# EAGLE board Adafruit MAX98357 Breakout (EAGLE 6.6.0)
REV: A
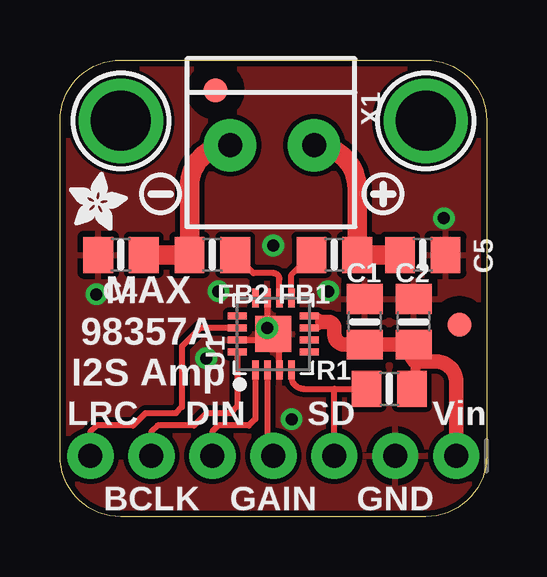
[diagram p0: board, top side]
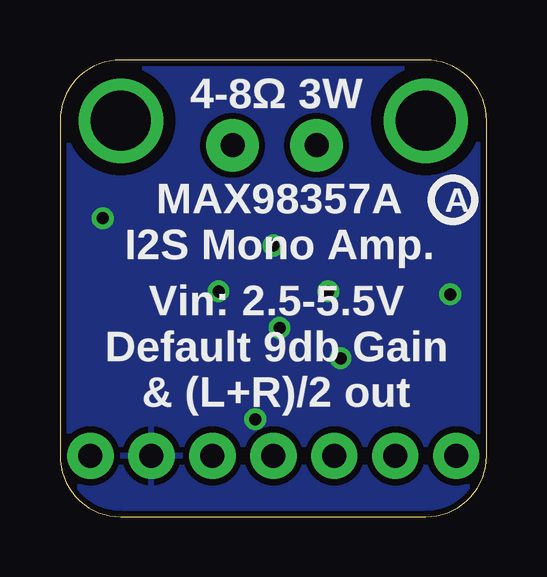
[diagram p1: board, bottom side, seen from below]

Size 17.78 x 19.05 mm. Coordinates in mm from the lower left corner, seen from the top.
Outline: 0,2.54 0,16.51 arc-90 2.54,19.05 15.24,19.05 arc-90 17.78,16.51 17.78,2.54 arc-90 15.24,0 2.54,0 arc-90 0,2.54
Copper layers (1*16): Top 0.035mm / dielectric 1.5mm / Bottom 0.035mm
Design rules "adafruit": minimum track width 8mil, minimum drill 15.5mil, track to track 8mil, track to pad 8mil, pad to pad 8mil, via to via 8mil, smd to smd 8mil, copper to edge 10mil, drill to drill 8mil, minimum pad ring 10mil, minimum via ring 8mil, stop-mask expansion 2mil, vias tented up to drill 20mil, thermal gap 10mil

## Footprints (pad centres in the part's own frame; a part is rotated, then mirrored left to right if it is on the bottom)
0805-NO = smd 1.24 x 1.5: 1 -0.95,0; 2 0.95,0
FIDUCIAL_1MM = smd 1 x 1: 1 0,0
1X07_ROUND_76 = drill 1 pad 1.93: 1 -7.62,0; 2 -5.08,0; 3 -2.54,0; 4 0,0; 5 2.54,0; 6 5.08,0; 7 7.62,0
QFN16_3MM = smd 0.8 x 0.28: 1 -1.5,0.75; 2 -1.5,0.25; 3 -1.5,-0.25; 4 -1.5,-0.75; 9 1.5,-0.75; 10 1.5,-0.25; 11 1.5,0.25; 12 1.5,0.75 | smd 0.28 x 0.8: 5 -0.75,-1.5; 6 -0.25,-1.5; 7 0.25,-1.5; 8 0.75,-1.5; 13 0.75,1.5; 14 0.25,1.5; 15 -0.25,1.5; 16 -0.75,1.5 | smd 1.5 x 1.5: THERMAL 0,0
MOUNTINGHOLE_2.5_PLATED = drill 2.5 pad 3.2: P$1 0,0
TERMBLOCK_1X2-3.5MM = drill 1 pad 2.184: 1 1.8,0; 2 -1.7,0

## Placement (x,y rotation side)
C1  0.1uF  [0805-NO]  12.7,8.13 90 top
C2  10uF  [0805-NO]  14.73,8.13 90 top
C4  220pF  [0805-NO]  2.54,10.92 180 top
C5  220pF  [0805-NO]  15.11,10.92 0 top
FB1  Ferrite  [0805-NO]  11.43,10.92 0 top
FB2  Ferrite  [0805-NO]  6.35,10.92 180 top
FID1  FIDUCIAL""  [FIDUCIAL_1MM]  16.64,8 0 top
FID2  FIDUCIAL""  [FIDUCIAL_1MM]  6.48,17.78 0 top
JP1  [1X07_ROUND_76]  8.89,2.54 180 top
R1  1M  [0805-NO]  13.72,5.33 0 top
U1  MAX98357A  [QFN16_3MM]  8.89,7.62 90 top
U$6  [SYMBOL_PLUS]  13.46,13.46 0 top
U$9  MOUNTINGHOLE2.5  [MOUNTINGHOLE_2.5_PLATED]  15.24,16.51 0 top
U$10  MOUNTINGHOLE2.5  [MOUNTINGHOLE_2.5_PLATED]  2.54,16.51 0 top
U$11  [SYMBOL_MINUS]  4.19,13.46 180 top
U$14  [ADAFRUIT_2.5MM]  0.38,11.94 0 top
U$15  [PCBFEAT-REV-040]  1.4,13.21 0 bottom
X1  [TERMBLOCK_1X2-3.5MM]  8.89,15.49 180 top

## Library data of the parts
C1 C2 C4 C5 FB1 FB2 JP1 R1 U1 U$6 U$11 U$14 U$15 X1 = microbuilder
FID1 FID2 U$9 U$10 = microbuilder; BOM: EXCLUDE

## Nets
BCLK: JP1.6 U1.16
DIN: JP1.5 U1.1
GAIN: JP1.4 U1.2
GND: C1.2 C2.2 C4.2 C5.2 JP1.2 U1.3 U1.11 U1.15 U1.THERMAL
LRCLK: JP1.7 U1.14
N$5: FB2.1 U1.10
N$6: FB1.1 U1.9
SD_MODE: JP1.3 R1.1 U1.4
VDD: C1.1 C2.1 JP1.1 R1.2 U1.7 U1.8
VO+: C5.1 FB1.2 X1.2
VO-: C4.1 FB2.2 X1.1

## Tracks (layer width: path | path; a pad name or v marks a point on that pad's centre or on a via)
BCLK
  Top 0.254: U1.16 7.39,4.6 7.11,4.32 6.1,4.32 5.59,3.81 4.06,3.81 3.81,3.56 JP1.6
DIN
  Top 0.254: U1.1 8.14,4.08 7.87,3.81 6.6,3.81 6.35,3.56 JP1.5
GAIN
  Top 0.254: U1.2 8.64,2.79 arc90 JP1.4
GND  (via drill 0.5)
  Top 0.254: U1.11 v8.64,7.87 arc90 U1.THERMAL | U1.15 8.64,7.37 arc90 U1.THERMAL | U1.3 9.14,7.37 arc90 U1.THERMAL
  other vias: 9.65,4.07 6.6,9.4 11.17,9.4 8.89,11.31 1.52,9.28 16,12.45 6.09,6.61
  pour Bottom (isolate 0.254): 17.78,19.05 17.78,0 0,0 0,19.05
  pour Top (isolate 0.203): 17.78,19.05 17.78,0 0,0 0,19.05
LRCLK
  Top 0.254: U1.14 5.84,7.87 5.08,7.11 5.08,4.57 4.83,4.32 3.56,4.32 3.05,3.81 1.52,3.81 1.27,3.56 JP1.7
N$5
  Top 0.254: U1.10 9.14,9.91 arc90 8.89,10.16 8.06,10.16 FB2.1
N$6
  Top 0.254: U1.9 9.64,10.08 FB1.1
SD_MODE
  Top 0.254: U1.4 9.64,5.85 arc90 10.16,5.33 11.43,5.33 | 11.43,5.33 R1.1 | JP1.3 11.43,5.33
VDD
  Top 0.254: U1.8 10.68,8.37 arc-90 10.92,8.13 arc-90 10.66,7.87 U1.7
  Top 0.406: 14.8,6.48 14.8,4.96 arc-90 R1.2
  Top 0.61: JP1.1 16.51,5.46 arc90 15.75,6.48 14.8,6.48 arc-90 C2.1 C1.1 11.87,7.18 arc-90 11.43,7.62 11.43,7.87 arc90 11.18,8.13 10.92,8.13
VO+
  Top 0.813: X1.2 arc-90 12.38,13.7 FB1.2 C5.1
VO-
  Top 0.813: X1.1 arc90 5.4,13.8 FB2.2 C4.1

## Text on the board
tPlace: MAX / 98357A / I2S Amp | LRC | DIN | SD | Vin | BCLK | GAIN | GND
bPlace: 4-8Ω 3W | MAX98357A / I2S Mono Amp. | Vin: 2.5-5.5V / Default 9db Gain / & (L+R)/2 out